# Altium PCB PCB.PcbDoc
Units mm, origin at the board's own origin, x right, y up, seen from the top; angles counter-clockwise.
Board outline 73 x 48 mm, 2 copper layers (Top Layer, Bottom Layer); 3 components, 0 nets, 20 pads, 0 vias.
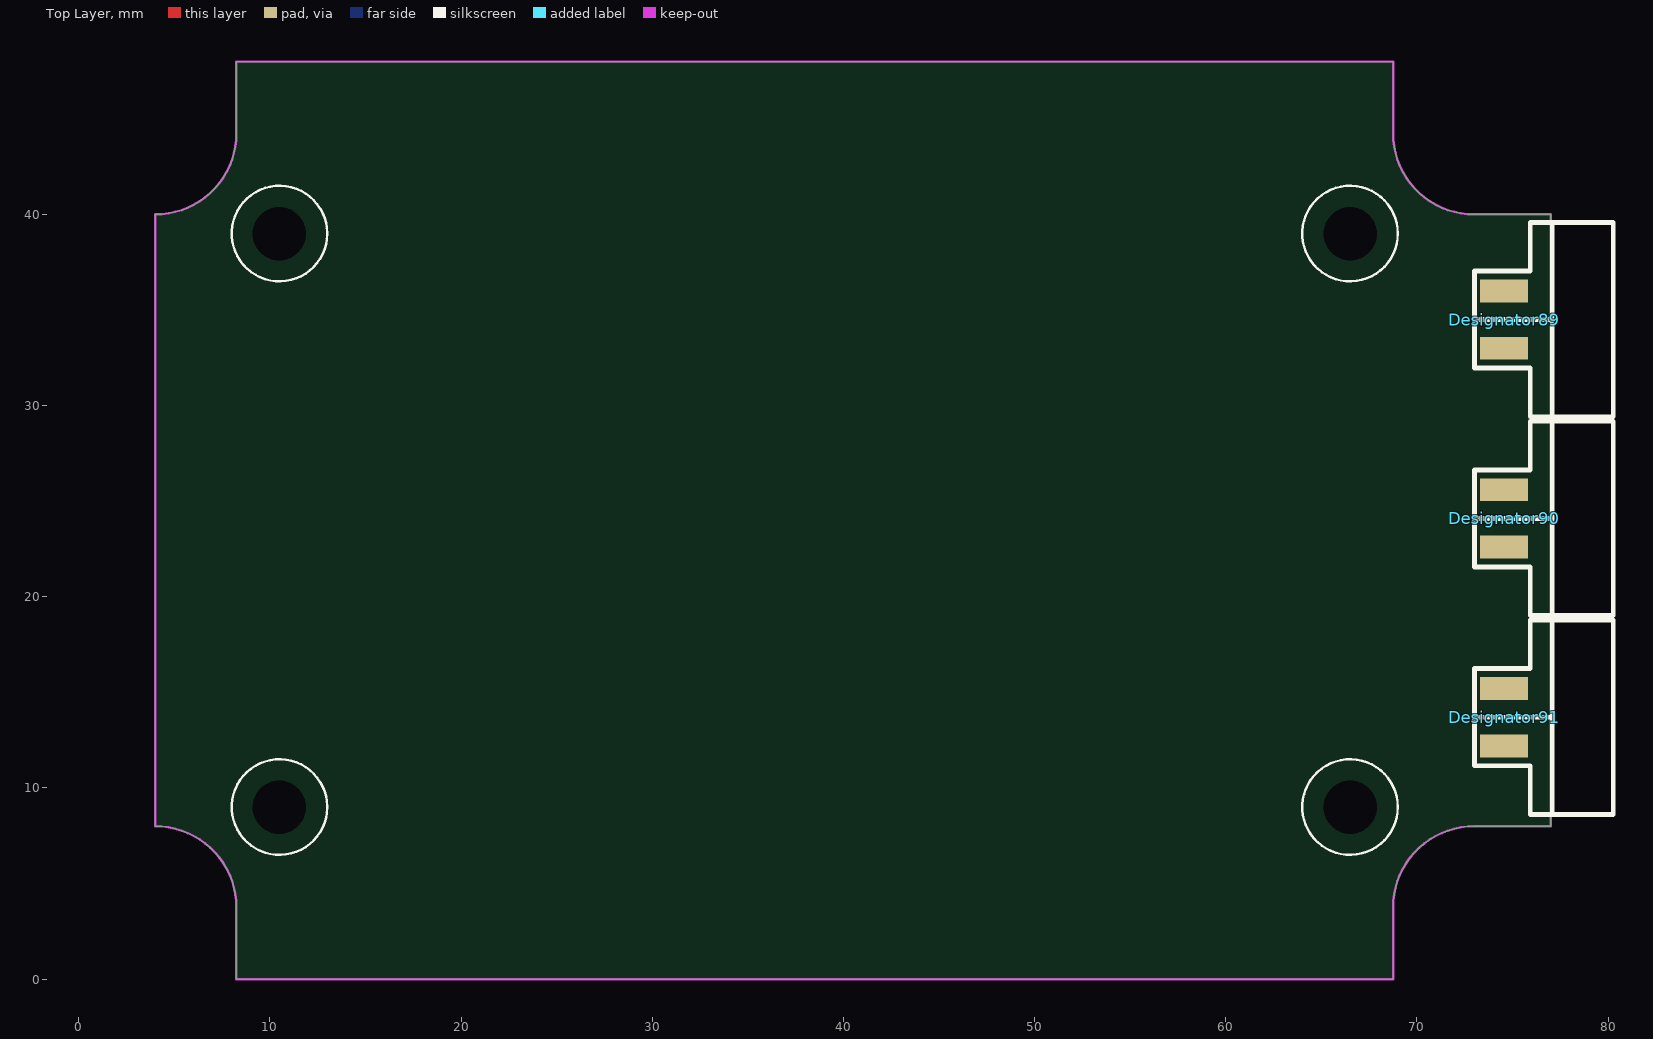
[diagram p0: Top Layer view]
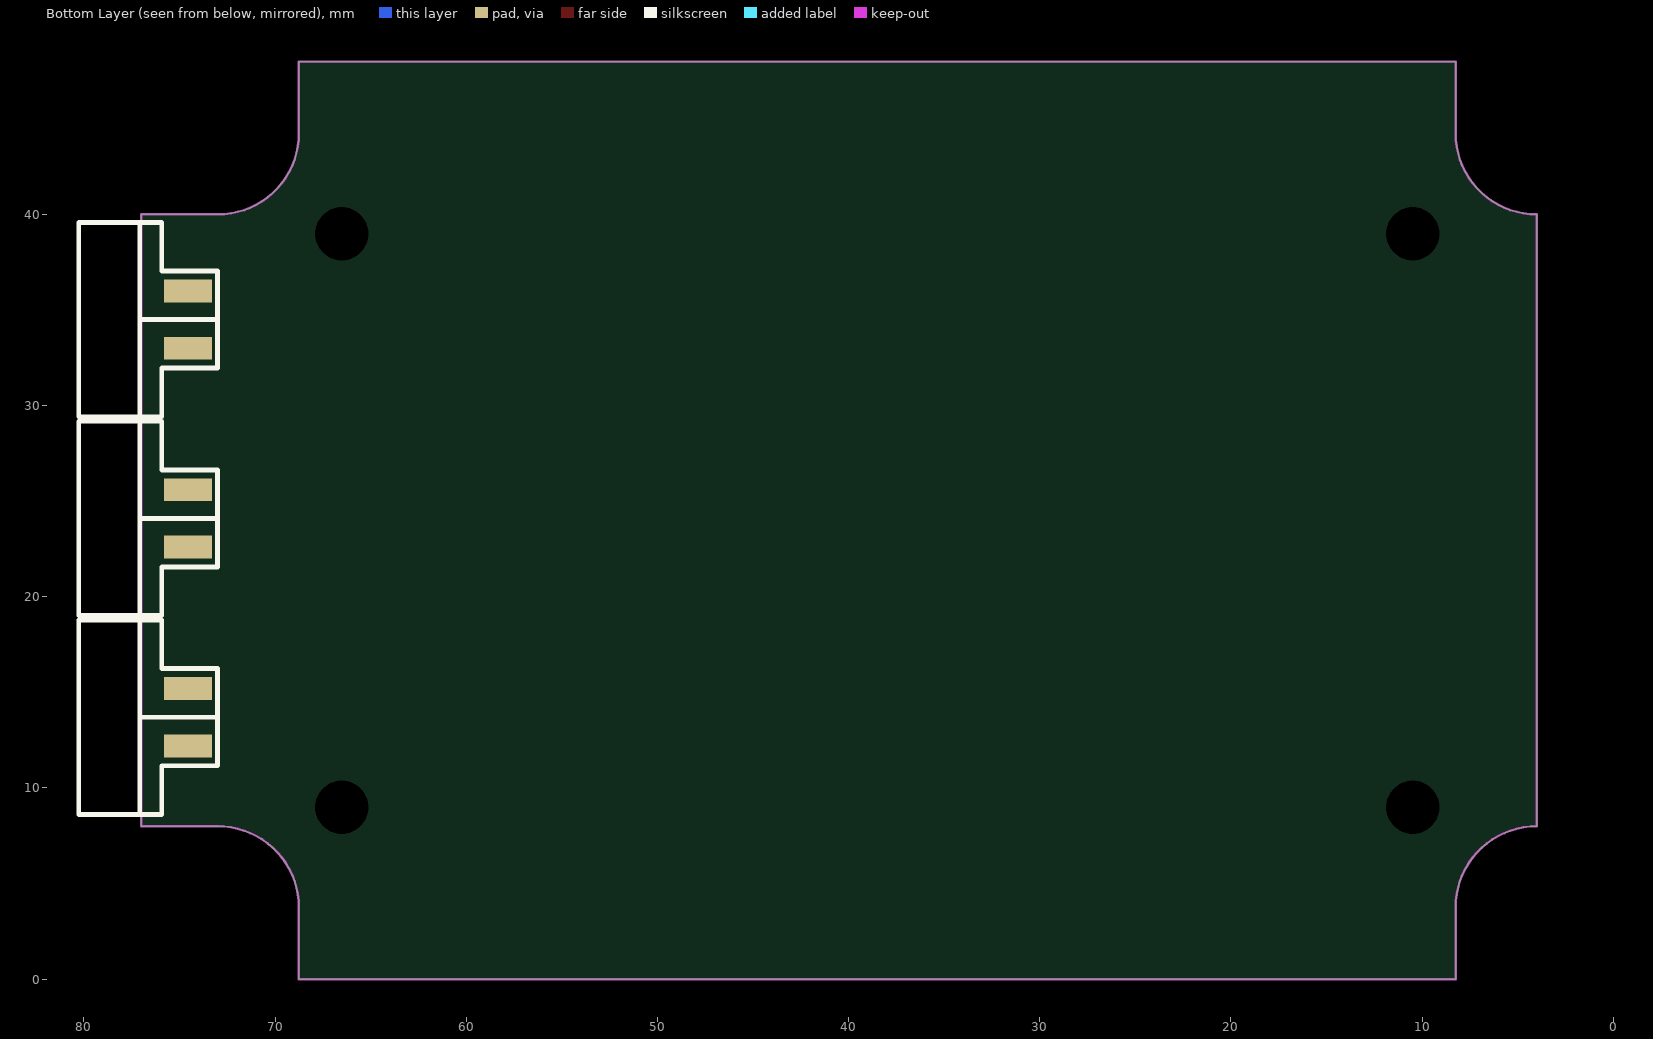
[diagram p1: Bottom Layer view, seen from below]

## Layer stack, top to bottom
Top Solder: solder mask 0.0102, Solder Resist, Dk 3.5
Top Layer: signal copper 0.0356
Dielectric 1: dielectric 0.32, FR-4, Dk 4.8
Bottom Layer: signal copper 0.0356
Bottom Solder: solder mask 0.0102, Solder Resist, Dk 3.5

## Board outline
8.25,0 8.25,3.75 ccw(c4,3.75) 4,8 4,40 ccw(c4,44.25) 8.25,44.25 8.25,48 67.75,48 68.75,48 68.75,44.25 ccw(c73,44.25) 73,40 77,40 77,8 73,8 ccw(c73,3.75) 68.75,3.75 68.75,0 67.75,0

## Design rules (kind name [scope] priority, off if disabled: settings)
Clearance [All] p1: gap=0.254 ignorepadtopadclearanceinfootprint=FALSE except(0: Arc-Hole Track-Hole SMDPad-Hole THPad-Hole Via-Hole Fill-Hole Poly-Hole Region-Hole Text-Hole)
PolygonConnect [All] p1: connectstyle=Relief reliefconductorwidth=0.254 reliefentries=4 polygonreliefangle="90 Angle" airgapwidth=0.254
RoutingVias [All] p1: holewidth=0.711 width=1.27 viastyle="Through Hole" minholewidth=0.711 minwidth=1.27 maxholewidth=0.711 maxwidth=1.27
SolderMaskExpansion [All] p1: expansion=0.102
Width [All] p1: maxlimit=0.254 minlimit=0.254 preferedwidth=0.254
30 further rules are at their usual default settings.

## Components (designator, comment, footprint, x,y, rotation, side; value= is the part's Value field where it differs from the comment)
Designator89 "Comment" 43045-M3045-2x2-B 79,34.5 r90 top
Designator90 "Comment" 43045-M3045-2x2-B 79,24.1 r90 top
Designator91 "Comment" 43045-M3045-2x2-B 79,13.7 r90 top

## Footprints (in the part's own frame and the unit in brackets; to place one, negate y for a bottom-side part, rotate by r counter-clockwise, add the part's x,y. Pads: shape width x height; smd on the part's side, far side on the other; paste and mask are expansions set on the pad)
43045-M3045-2x2-B [mm] "Micro-Fit 3.0™ Vertical Angle Header, 3.00mm Pitch, Dual Row, 4 Circuits, with Solder Tab, Gold, Glow Wire Capable, Black"
  rect 1.2x2.5 smd far side: 1(-1.5,4.445) 3(1.5,4.445)
  rect 1.2x2.5 smd: 2(-1.5,4.445) 4(1.5,4.445)
  silkscreen extent -5.08,-1.27 5.08,5.99, body extent -4.86,-7.97 4.86,5.68, height 3.62

## Free pads (board coordinates)
  round 0 hole 8: ""(4,3.75) ""(4,44.25) ""(73,3.75) ""(73,44.25)
  round 0 hole 2.8: ""(10.5,9) ""(10.5,39) ""(66.5,9) ""(66.5,39)

## Nets (pads, with @x,y where several pads share a name; then routed paths per layer and width w, separated by ;. In a path a pad name is that pad's centre, name@x,y a point inside that pad or via, vN(x,y) a via of type N, cw(c..) or ccw(c..) an arc to the next point about the centre after c; other vN are vias at no path point)
pads on no net: Designator89.1 Designator89.2 Designator89.3 Designator89.4 Designator90.1 Designator90.2 Designator90.3 Designator90.4 Designator91.1 Designator91.2 Designator91.3 Designator91.4

## Keep-outs
Keep-Out Layer:
  the board outline again, w0.127

## Silkscreen, mask and mechanical layers (free items; w line width, h text height)
Top Overlay:
  circle w0.127: c66.5,39 r2.5
  circle w0.127: c10.5,39 r2.5
  circle w0.127: c66.5,9 r2.5
  circle w0.127: c10.5,9 r2.5